# Altium PCB 8bit_reg_v2.PcbDoc
Units mm, origin at the board's own origin, x right, y up, seen from the top; angles counter-clockwise.
Board outline 40 x 50 mm, 2 copper layers (Top Layer, Bottom Layer); 23 components, 38 nets, 110 pads, 28 vias.
Unrouted connection lines stored in the file: 1.
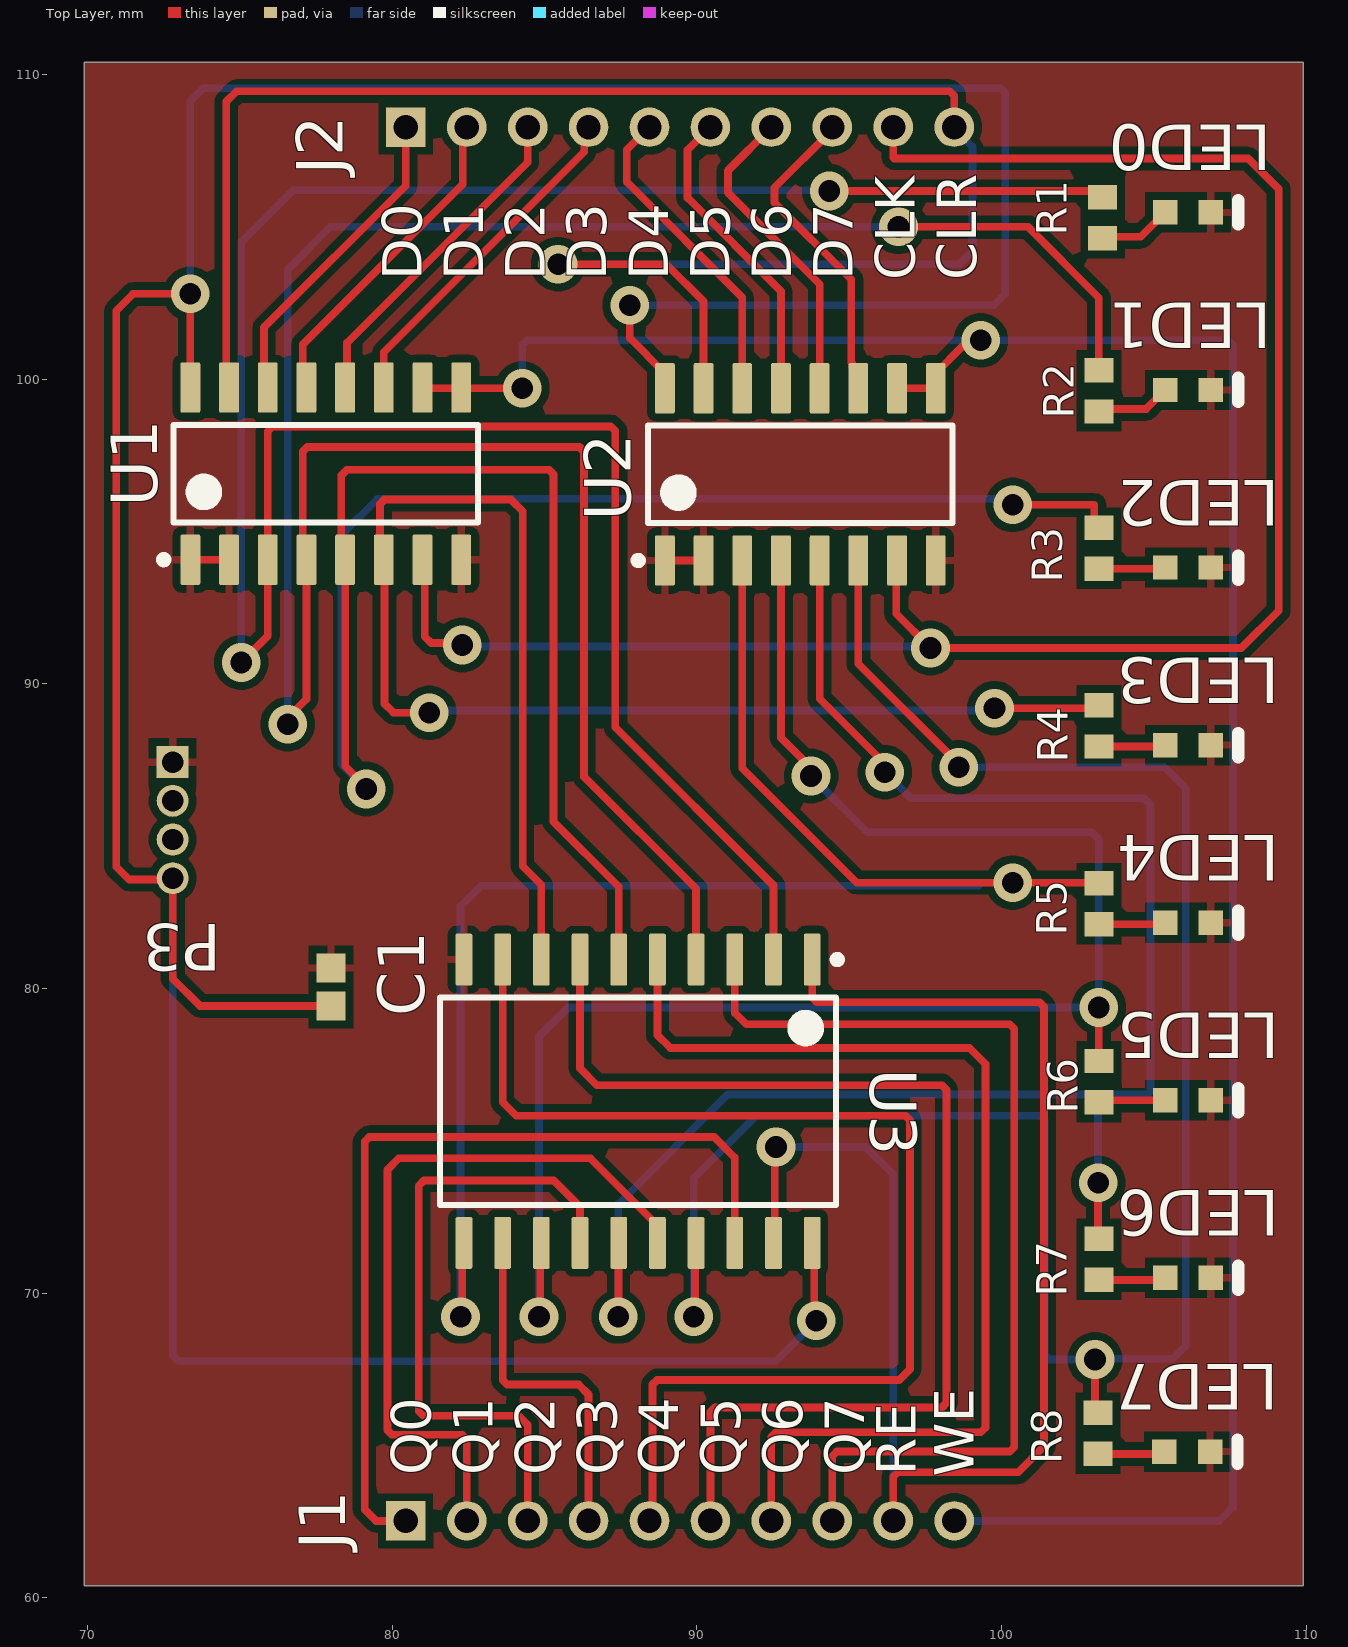
[diagram p0: Top Layer view]
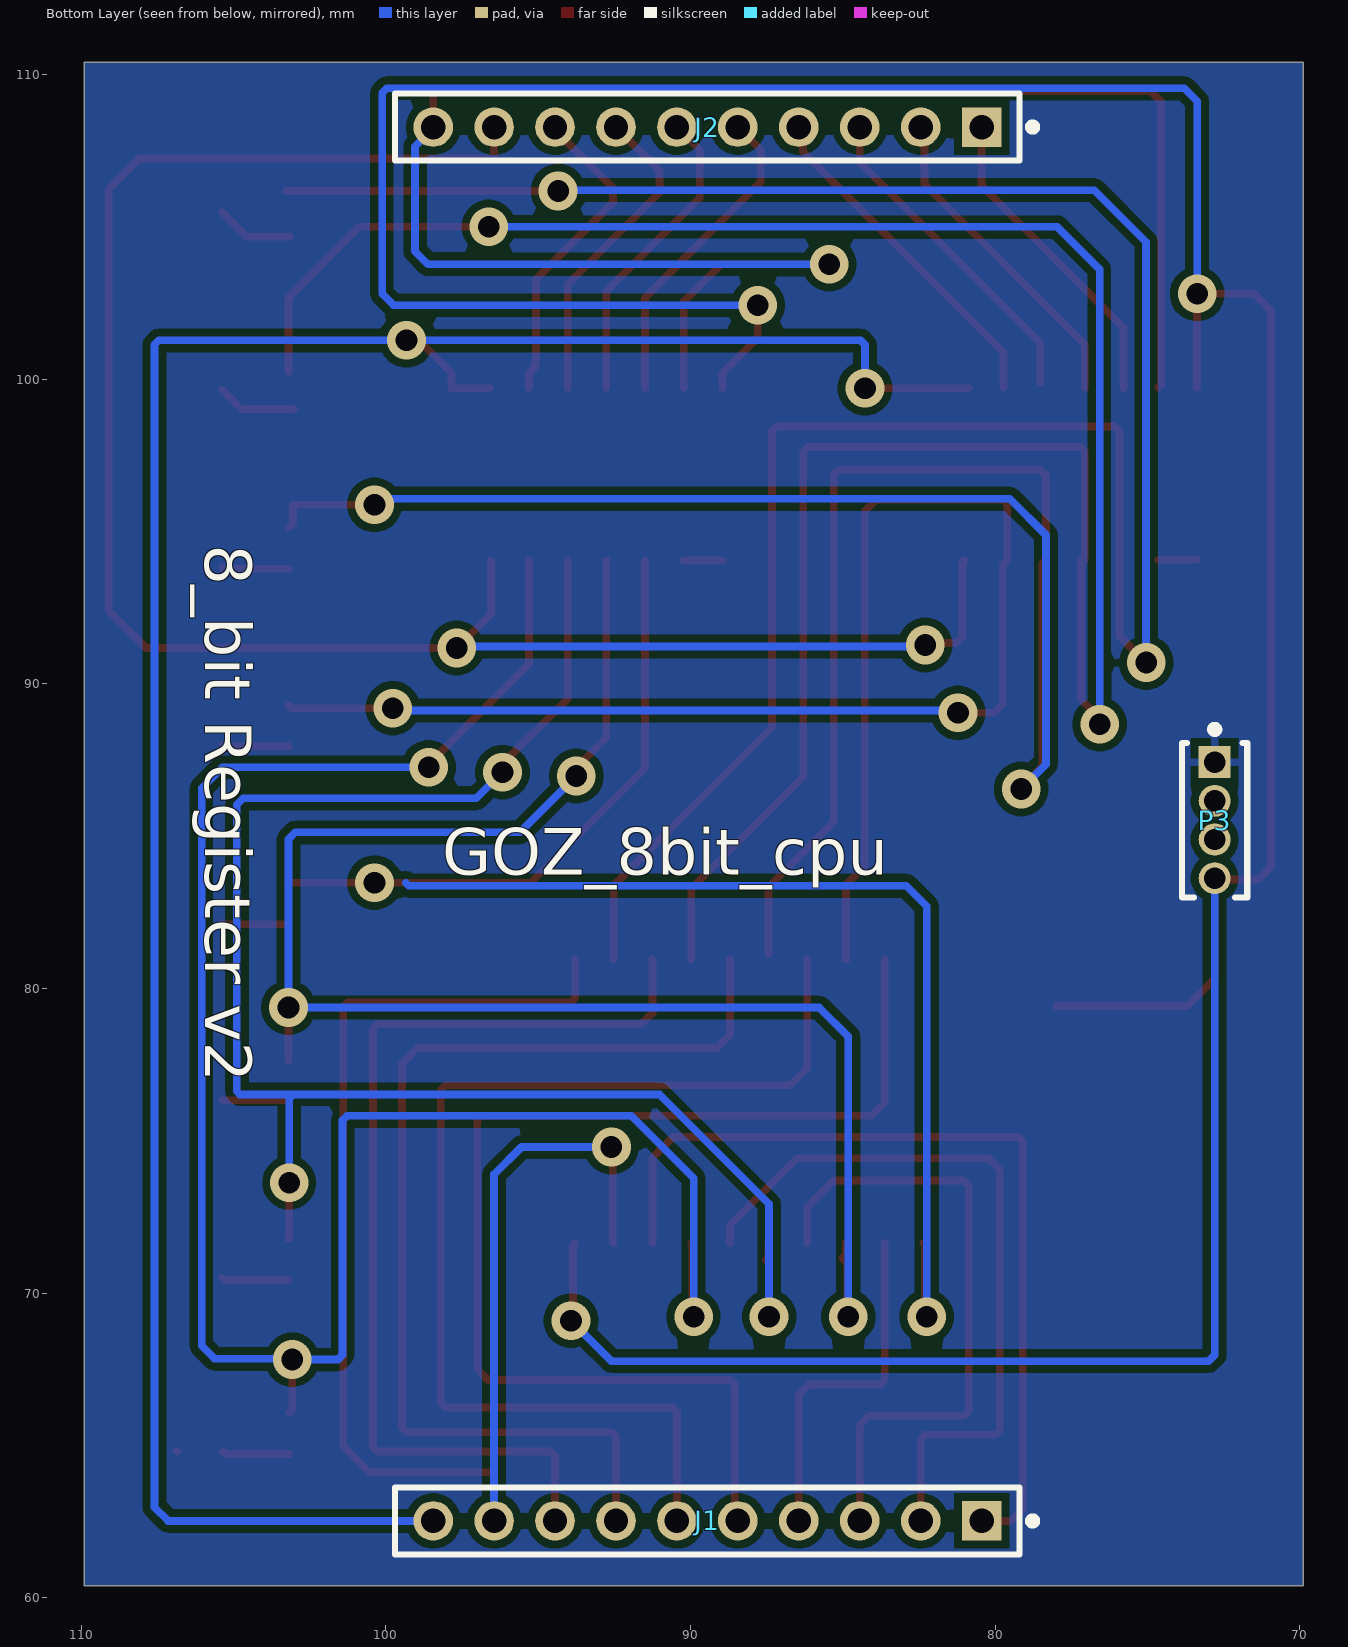
[diagram p1: Bottom Layer view, seen from below]
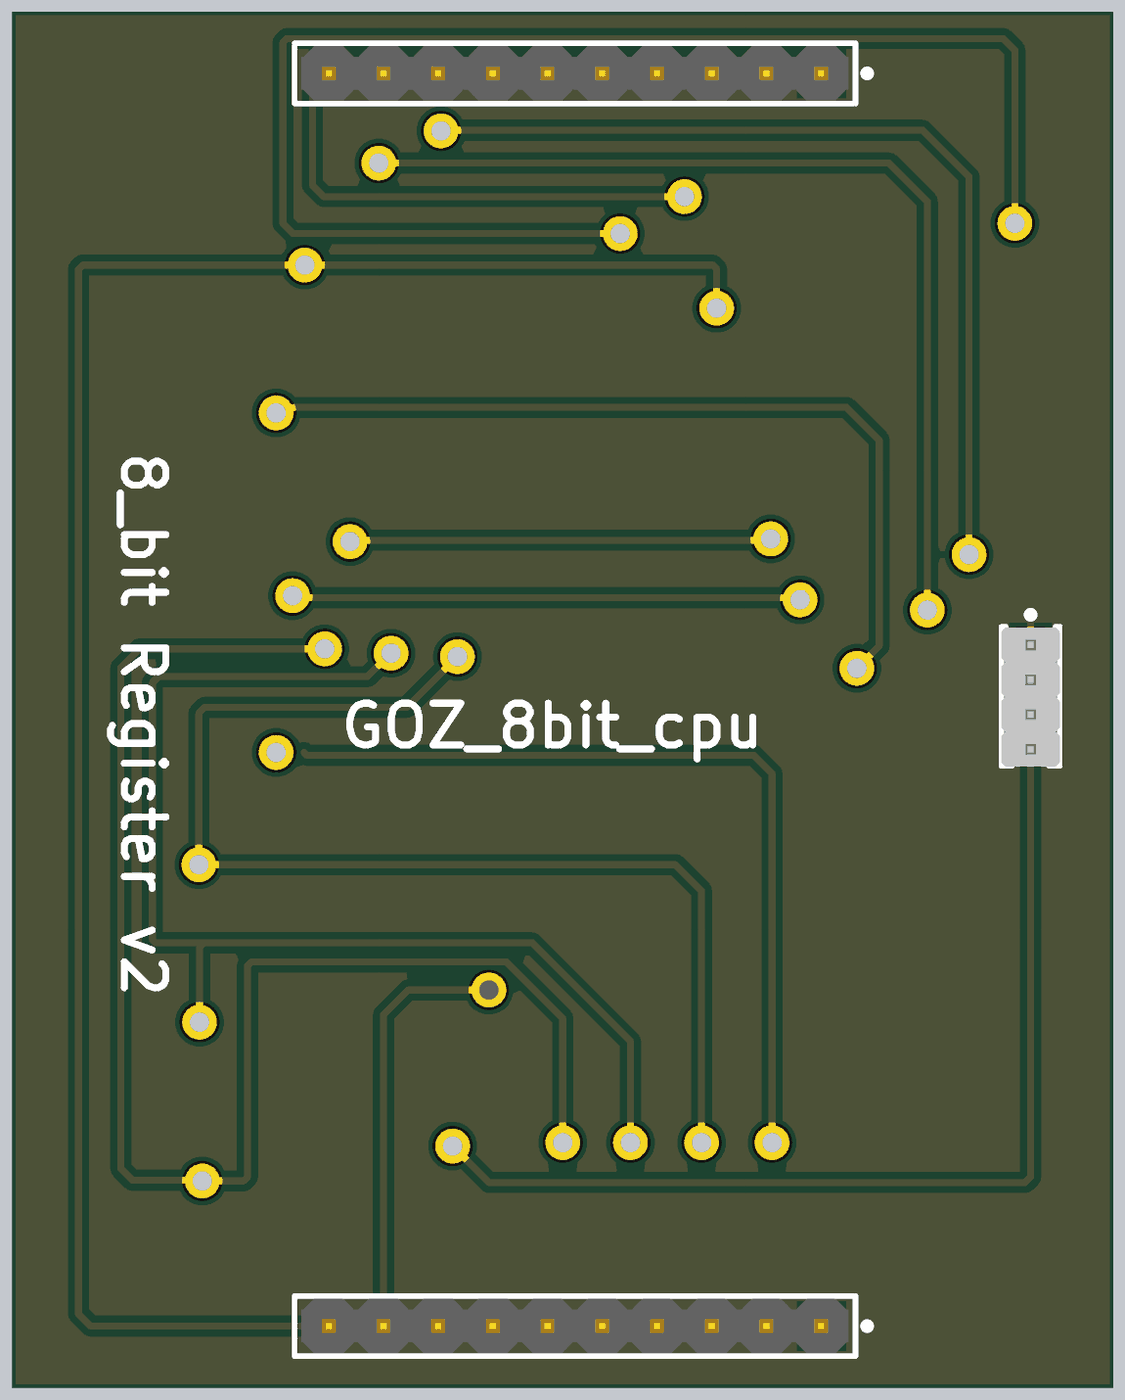
[diagram p2: 3D render of the assembled board from below, using the file's embedded part models]

## Layer stack, top to bottom
Top Solder: solder mask 0.0102, Solder Resist, Dk 3.5
Top Layer: signal copper 0.0356
Dielectric 1: dielectric 0.32, FR-4, Dk 4.8
Bottom Layer: signal copper 0.0356
Bottom Solder: solder mask 0.0102, Solder Resist, Dk 3.5

## Board outline
69.9,60.4 69.9,110.4 109.9,110.4 109.9,60.4

## Design rules (kind name [scope] priority, off if disabled: settings)
Clearance [All] p1: gap=0.254 ignorepadtopadclearanceinfootprint=FALSE
PolygonConnect [All] p1: connectstyle=Relief reliefconductorwidth=0.254 reliefentries=4 polygonreliefangle="90 Angle" airgapwidth=0.254
RoutingVias [All] p1: holewidth=0.711 width=1.27 viastyle="Through Hole" minholewidth=0.711 minwidth=1.27 maxholewidth=0.711 maxwidth=1.27
SolderMaskExpansion [All] p1: expansion=0.102 istentingtop=FALSE
SupplyNets "Schematic Supply Nets_1" [InNet('+5')] p1: voltage=0.000
SupplyNets "Schematic Supply Nets" [InNet('GND')] p2: voltage=0.000
Width [All] p1: maxlimit=0.254 minlimit=0.254 preferedwidth=0.254
30 further rules are at their usual default settings.

## Components (designator, comment, footprint, x,y, rotation, side; value= is the part's Value field where it differs from the comment)
C1 "Capacitor 100 nF +/-10% 50 V 0603" CAPC1608X90X40NL10T20 78,80.05 r90 top value=100nF
J1 "NRPN101PAEN-RC" FP-NRPN101PAEN-RC-MFG 89.45,62.525 r0 bottom
J2 "NRPN101PAEN-RC" FP-NRPN101PAEN-RC-MFG 89.45,108.275 r0 bottom
LED0 "19-217/R6C-AL1M2VY/3T" EVRL-0603-2_V 106.125,105.475 r0 top (schematic designator D1)
LED1 "19-217/R6C-AL1M2VY/3T" EVRL-0603-2_V 106.125,99.646 r0 top (schematic designator D2)
LED2 "19-217/R6C-AL1M2VY/3T" EVRL-0603-2_V 106.125,93.818 r0 top (schematic designator D3)
LED3 "19-217/R6C-AL1M2VY/3T" EVRL-0603-2_V 106.125,87.989 r0 top (schematic designator D4)
LED4 "19-217/R6C-AL1M2VY/3T" EVRL-0603-2_V 106.125,82.161 r0 top (schematic designator D5)
LED5 "19-217/R6C-AL1M2VY/3T" EVRL-0603-2_V 106.125,76.332 r0 top (schematic designator D6)
LED6 "19-217/R6C-AL1M2VY/3T" EVRL-0603-2_V 106.125,70.504 r0 top (schematic designator D7)
LED7 "19-217/R6C-AL1M2VY/3T" EVRL-0603-2_V 106.1,64.8 r0 top (schematic designator D8)
P3 "GRPB041VWVN-RC" SLIN-GRPB041VWVN-RC_V 72.8,85.525 r270 bottom
R1 "ERJ-3RQFR56V" RESC1608X55X30NL15T15 103.325,105.3 r270 top
R2 "ERJ-3RQFR56V" RESC1608X55X30NL15T15 103.2,99.614 r270 top
R3 "ERJ-3RQFR56V" RESC1608X55X30NL15T15 103.2,94.454 r270 top
R4 "ERJ-3RQFR56V" RESC1608X55X30NL15T15 103.2,88.618 r270 top
R5 "ERJ-3RQFR56V" RESC1608X55X30NL15T15 103.2,82.782 r270 top
R6 "ERJ-3RQFR56V" RESC1608X55X30NL15T15 103.2,76.946 r270 top
R7 "ERJ-3RQFR56V" RESC1608X55X30NL15T15 103.2,71.111 r270 top
R8 "ERJ-3RQFR56V" RESC1608X55X30NL15T15 103.175,65.4 r270 top
U1 "SN74LS173AD" D0016A_M 77.825,96.9 r90 top
U2 "SN74LS173AD" D0016A_M 93.4,96.875 r90 top
U3 "SN74ACT244IDWREP" DW0020A_L 88.075,76.3 r270 top

## Footprints (in the part's own frame and the unit in brackets; to place one, negate y for a bottom-side part, rotate by r counter-clockwise, add the part's x,y. Pads: shape width x height; smd on the part's side, far side on the other; paste and mask are expansions set on the pad)
CAPC1608X90X40NL10T20 [mm] "Chip Capacitor, 2-Leads, Body 1.70x0.90mm, IPC Medium Density"
  rect 0.95x0.95 smd: 1(-0.625,0) 2(0.625,0)
  body extent -0.85,-0.45 0.85,0.45, height 0.9
D0016A_M [mm] "SOIC, 16-Leads, Body 10x4mm, Pitch 1.27mm, IPC Low Density"
  rrect15% 1.65x0.65 smd: 1(-2.825,4.445) 2(-2.825,3.175) 3(-2.825,1.905) 4(-2.825,0.635) 5(-2.825,-0.635) 6(-2.825,-1.905) 7(-2.825,-3.175) 8(-2.825,-4.445) 9(2.825,-4.445) 10(2.825,-3.175) 11(2.825,-1.905) 12(2.825,-0.635) 13(2.825,0.635) 14(2.825,1.905) 15(2.825,3.175) 16(2.825,4.445)
  silkscreen extent -2.95,-5 1.6,5.44, body extent -3,-4.95 3,4.95, height 1.59
DW0020A_L [mm] "SOIC, 20-Leads, Body 13x7.6mm, Pitch 1.27mm, IPC High Density"
  rrect18% 1.7x0.55 smd: 1(-4.65,5.715) 2(-4.65,4.445) 3(-4.65,3.175) 4(-4.65,1.905) 5(-4.65,0.635) 6(-4.65,-0.635) 7(-4.65,-1.905) 8(-4.65,-3.175) 9(-4.65,-4.445) 10(-4.65,-5.715) 11(4.65,-5.715) 12(4.65,-4.445) 13(4.65,-3.175) 14(4.65,-1.905) 15(4.65,-0.635) 16(4.65,0.635) 17(4.65,1.905) 18(4.65,3.175) 19(4.65,4.445) 20(4.65,5.715)
  silkscreen extent -4.77,-6.5 3.4,6.67, body extent -5.16,-6.4 5.16,6.4, height 2.52
EVRL-0603-2_V [mm] "SMD, 2-Leads, Body 1.6x0.8mm"
  rect 0.8x0.8 smd: 1(-0.75,0) 2(0.75,0)
  silkscreen extent 1.65,-0.4 1.65,0.4, body extent -0.8,-0.4 0.8,0.4, height 0.5
FP-NRPN101PAEN-RC-MFG [mm]
  rect 1.3x1.3 hole 0.8 paste-2539.97 mask+0: 1(-9,0)
  round 1.3 hole 0.8 paste-2539.97 mask+0: 2(-7,0) 3(-5,0) 4(-3,0) 5(-1,0) 6(1,0) 7(3,0) 8(5,0) 9(7,0) 10(9,0)
  silkscreen extent -10.8,-1.1 10.25,1.1, body extent -9.99,-1 10.01,1, height 5.95
RESC1608X55X30NL15T15 [mm] "Chip Resistor, 2-Leads, Body 1.60x0.80mm, IPC Medium Density"
  rect 0.8x0.95 smd: 1(-0.675,0) 2(0.675,0)
  body extent -0.87,-0.48 0.87,0.48, height 0.55
SLIN-GRPB041VWVN-RC_V [mm] "Header, 4-Leads, Body 5.08x2.14mm, Pitch 1.27mm"
  rect 1.05x1.05 hole 0.7: 1(-1.905,0)
  round 1.05 hole 0.7: 2(-0.635,0) 3(0.635,0) 4(1.905,0)
  silkscreen extent -3.1,-1.07 2.54,1.07, body extent -2.54,-1.07 2.54,1.07, height 4

## Part data
C1: library part CMP-001-00017-6, "Chip Capacitor, 100 nF, +/- 10%, 50 V, 0603 (1608 Metric)", Capacitor Type=Ceramic, Case/Package=0603, Max Operating Temperature=125°C, Min Operating Temperature=-55°C, Tolerance=10%, Voltage Rating=50V, Mounting Technology=SM, Pins=2, RoHS Compliant=True
J1 J2: library part CMP-25680-000006-1, "CONN HEADER VERT 10POS 2MM", Current Rating=2A, Manufacturer=Sullins, Package=0, Temperature="-40°C to +105°C", Temperature Range High=+105°C, Temperature Range Low=-40°C, Voltage Rating=150V, Automotive=No, Category=Conn, ComponentLink2Description=Datasheet, ComponentLink2URL=https://s3.amazonaws.com/catalogspreads-pdf/PAGE104-105%202mm%20MALE%20HDR%20ST%20RA%20SMT.pdf, Conn Gender=Male, Conn Orientation=Straight, Contact Material=Gold,Nickel, Device Class L1=Connectors, Device Class L2="Headers and Wire Housings", Device Class L3=unset, Digikey Description="CONN HEADER VERT 10POS 2MM", Footprint Url=https://drawings-pdf.s3.amazonaws.com/10531.pdf, Height=5.95mm, Lead Free=Yes, Manufacturer Part Number=NRPN101PAEN-RC, Number Of Contacts=10, Number Of Rows=1, Octopart=https://octopart.com/nrpn101paen-rc-sullins-18674398, Pitch=2mm, RoHS=TRUE
LED0 LED1 LED2 LED3 LED4 LED5 LED6 LED7: library part CMP-007-00004-2, "Chip LED, Red, 5 V, 25 mA, -40 to 85 degC, 2-Pin SMD (0603), RoHS, Tape and Reel", Case/Package=0603, Colour=Red, Forward Voltage=2.2V, Manufacturer="Everlight Electronics", Package Description="2-Pin Surface Mount Device, Body 1.6 x 0.8 mm", Datasheet URL=https://datasheet.ciiva.com/4688/el-19-217-r6c-al1m2vy-3tpdf-187026-4688713.pdf, Datasheet Version="Rev. 1, 01/2005", Lens Style=Clear, Manufacturer URL=http://www.everlight.com/, Mounting Technology=SM, Package Reference=0603, RoHS Compliant=False
P3: library part CMP-2000-06373-1, "Male Header, Pitch 1.27 mm, 1 x 4 Position, Height 4 mm, Tail Length 2.3 mm, -40 to 105 degC, RoHS, Bulk", Manufacturer=Sullins, Package Description="Male Header, Pitch 1.27 mm, 1 x 4 Position, Height 4 mm, Tail Length 2.3 mm", Standard Package=1, Catalog Drawings=S9014ESeriesTop, Category=Connectors,Interconnects, Connector Type=Header,Unshrouded, Contact Finish=Gold, Contact Finish Thickness=Flash, Contact Mating Length="0.118\"(3.00mm)", Contact Type=MalePin, Datasheet URL=http://www.sullinscorp.com/drawings/71_GRPB___1VWVN-RC,_10957-C.pdf, Datasheet Version="Rev. C, 12/2008", Dynamic Catalog=GRPB, Family=RectangularConnectors-Headers,MalePins, Manufacturer URL=http://www.sullinscorp.com/, Mating Products="S9010E-04-ND / -CONNHEADER.050\"4POSR/APCB / S9008E-04-ND / -CONNHEADER.050\"4POSPCBGOLD / S9005E-04-ND / -CONNHEADER.050\"4POSSMDGOLD", Mounting Technology=ThroughHole, Mounting Type=ThroughHole, Number of Positions=4, Number of Positions Loaded=All, Number Of Rows=1, Other Names=S9014E-04, Package Reference=GRPB041VWVN-RC, Packaging=Bulk, Pitch="0.050\"(1.27mm)", Termination=Solder
R1 R2 R3 R4 R5 R6 R7 R8: library part CMP-2000-00858-1, Manufacturer=Panasonic, Part Number=ERJ-3RQFR56V
U1 U2: library part CMP-019-00049-1, "TEXAS INSTRUMENTS SN74LS173AD Flip-Flop, D, 17 ns, 50 MHz, 24 mA, SOIC, 16 Pins"
U3: library part CMP-0440-00699-3, "Enhanced Product Octal Buffers/Drivers With 3-State Outputs, DW0020A, LARGE T&R", F @ Nom Voltage(Max)(Mhz)=90, Generic Part Number=SN74ACT244-EP, ICC @ Nom Voltage(Max)(mA)=0.04, Manufacturer="Texas Instruments", Operating Temperature Range(C)="-40 to 85", Rating="HiRel Enhanced Product", tpd @ Nom Voltage(Max)(ns)=9, Voltage(Nom)(V)=5, Code_JEDEC=MS-013, DatasheetVersion=SCAS724B, Input Type=TTL, Output Type=CMOS, PackageReference=DW0020A, PackageVersion=http://www.ti.com/lit/ml/mpds173a/mpds173a.pdf, VCC(Max)(V)=5.5, VCC(Min)(V)=4.5

## Via types
v1: diameter 1.27, hole 0.711, Top Layer to Bottom Layer, 28 vias

## Nets (pads, with @x,y where several pads share a name; then routed paths per layer and width w, separated by ;. In a path a pad name is that pad's centre, name@x,y a point inside that pad or via, vN(x,y) a via of type N, cw(c..) or ccw(c..) an arc to the next point about the centre after c; other vN are vias at no path point)
+5: C1.1 P3.4 U1.16 U2.16 U3.20 | length 130.4
  Top Layer w0.254: U1.16 73.378,99.728 73.378,102.797 v1(73.375,102.8) 71.5,102.8 70.95,102.25 70.95,84 71.375,83.575 72.8,83.575 72.8,80.325 73.7,79.425 C1.1 ; v1(87.8,102.425) 87.8,101.355 88.955,100.2 U2.16 ; U3.20 93.858,71.583 93.858,69.167 v1(93.925,69.1)
  Bottom Layer w0.254: P3.4 72.8,67.97 73,67.77 92.595,67.77 v1(93.925,69.1) ; v1(73.375,102.8) 73.375,109.125 73.8,109.55 99.976,109.55 100.125,109.401 100.125,102.8 99.75,102.425 v1(87.8,102.425)
CLK: J2.9 U1.7 U2.7 | length 62.5
  Top Layer w0.254: U1.7 81.075,94 81.075,91.55 81.284,91.341 82.234,91.341 v1(82.3,91.275) ; J2.9 96.45,107.275 96.481,107.244 108.098,107.244 109.1,106.242 109.1,92.4 107.875,91.175 v1(97.675,91.175) 96.55,92.3 96.55,94.025 U2.7
  Bottom Layer w0.254: v1(82.3,91.275) 82.35,91.225 97.35,91.225 97.4,91.175 v1(97.675,91.175)
CLR: J2.10 U1.15 U2.15 | length 60.8
  Top Layer w0.254: U1.15 74.563,99.813 74.563,109.113 74.9,109.45 98.301,109.45 98.45,109.301 J2.10 ; v1(85.45,103.775) 89,103.775 90.225,102.55 U2.15
  Bottom Layer w0.254: v1(85.45,103.775) 98.625,103.775 99.05,104.2 99.05,107.627 98.45,108.227 J2.10
D0: J2.1 U1.14 | length 10.5
  Top Layer w0.254: U1.14@75.795,99.7 75.795,101.695 80.45,106.35 J2.1
D1: J2.2 U1.13 | length 10.8
  Top Layer w0.254: U1.13@77.065,99.7 77.065,101.14 82.32,106.395 82.32,108.145 J2.2
D2: J2.3 U1.12 | length 10.8
  Top Layer w0.254: U1.12@78.525,99.89 78.525,101.2 84.45,107.125 J2.3
D3: J2.4 U1.11 | length 11.3
  Top Layer w0.254: U1.11 79.73,100.88 86.312,107.462 86.312,108.137 J2.4
D4: J2.5 U2.14 | length 10.5
  Top Layer w0.254: J2.5 87.7,107.525 87.7,106.475 91.495,102.68 U2.14
D5: J2.6 U2.13 | length 10.2
  Top Layer w0.254: J2.6 89.7,107.525 89.7,105.95 92.765,102.885 U2.13
D6: J2.7 U2.12 | length 10.4
  Top Layer w0.254: J2.7 91.025,106.85 91.025,106.125 94.035,103.115 U2.12
D7: J2.8 U2.11 | length 10.5
  Top Layer w0.254: J2.8 94.45,108.178 92.55,106.278 92.55,105.8 95.075,103.275 95.075,100.547 95.107,100.515 95.107,100.398 95.305,100.2 U2.11
GND: C1.2 LED0.2 LED1.2 LED2.2 LED3.2 LED4.2 LED5.2 LED6.2 LED7.2 P3.1 U1.1 U1.2 U1.8 U2.1 U2.2 U2.8 U3.10 | length 2.6
  Top Layer w0.254: U1.1 U1.2 ; U2.1 U2.2 ; LED7.2 LED7.2@106.875,64.825
NetD1_1: LED0.1 R1.2 | length 2.5
  Top Layer w0.254: R1.2@103.168,104.675 104.575,104.675 LED0.1
NetD2_1: LED1.1 R2.2 | length 2.6
  Top Layer w0.254: R2.2@103.031,99.025 104.754,99.025 LED1.1
NetD3_1: LED2.1 R3.2 | length 2.2
  Top Layer w0.254: R3.2 105.336,93.779 LED2.1
NetD4_1: LED3.1 R4.2 | length 2.2
  Top Layer w0.254: R4.2 105.329,87.943 LED3.1
NetD5_1: LED4.1 R5.2 | length 2.2
  Top Layer w0.254: R5.2 105.321,82.107 LED4.1
NetD6_1: LED5.1 R6.2 | length 2.2
  Top Layer w0.254: R6.2 103.261,76.332 LED5.1
NetD7_1: LED6.1 R7.2 | length 2.2
  Top Layer w0.254: R7.2 105.307,70.436 LED6.1
NetD8_1: LED7.1 R8.2 | length 2.2
  Top Layer w0.254: R8.2 105.275,64.725 LED7.1
NetJ1_1: J1.1 U3.18 | length 28.9
  Top Layer w0.254: J1.1 79.475,62.525 79.1,62.9 79.1,74.976 79.249,75.125 90.575,75.125 91.25,74.45 U3.18
NetJ1_2: J1.2 U3.16 | length 24.5
  Top Layer w0.254: J1.2 82.45,65.201 82.301,65.35 79.999,65.35 79.85,65.499 79.85,74.05 80.225,74.425 86.51,74.425 88.71,72.225 U3.16
NetJ1_3: J1.3 U3.14 | length 21.2
  Top Layer w0.254: J1.3 84.45,65.675 84.15,65.975 81.024,65.975 80.875,66.124 80.875,73.525 81.05,73.7 85.307,73.7 86.17,72.837 U3.14
NetJ1_4: J1.4 U3.12 | length 11.7
  Top Layer w0.254: U3.12 83.63,67.149 83.779,67 86.125,67 86.45,66.675 J1.4
NetJ1_5: J1.5 U3.9 | length 39.6
  Top Layer w0.254: U3.9 83.63,76.27 84.075,75.825 96.851,75.825 97,75.676 97,67.5 96.65,67.15 88.699,67.15 88.55,67.001 88.55,62.625 J1.5
NetJ1_6: J1.6 U3.7 | length 37.6
  Top Layer w0.254: U3.7 86.17,77.38 86.725,76.825 98.051,76.825 98.2,76.676 98.2,66.399 98.051,66.25 90.599,66.25 90.45,66.101 J1.6
NetJ1_7: J1.7 U3.5 | length 35.5
  Top Layer w0.254: U3.5 88.71,78.474 89.134,78.05 98.95,78.05 99.475,77.525 99.475,65.586 99.326,65.437 92.599,65.437 92.45,65.288 J1.7
NetJ1_8: J1.8 U3.3 | length 33.1
  Top Layer w0.254: U3.3 91.25,79.199 91.624,78.825 100.276,78.825 100.425,78.676 100.425,64.949 100.276,64.8 94.599,64.8 94.45,64.651 J1.8
Q0: R1.1 U1.3 U3.2 | length 81.7
  Top Layer w0.254: v1(75.05,90.7) 75.923,91.573 75.923,93.948 75.92,93.95 75.92,98.295 76.075,98.45 87.176,98.45 87.325,98.301 87.325,88.575 92.52,83.38 U3.2 ; v1(94.35,106.175) R1.1@103.273,106.175
  Bottom Layer w0.254: v1(75.05,90.7) 75.05,104.5 76.75,106.2 94.325,106.2 v1(94.35,106.175)
Q1: R2.1 U1.4 U3.4 | length 82.3
  Top Layer w0.254: v1(76.575,88.675) 76.575,88.882 77.19,89.497 U1.4 ; U1.4@77.065,94.075 77.065,97.626 77.214,97.775 86.151,97.775 86.3,97.626 86.3,86.95 89.98,83.27 U3.4 ; v1(96.625,105) 100.875,105 103.2,102.675 R2.1@103.2,100.245
  Bottom Layer w0.254: v1(76.575,88.675) 76.575,103.601 77.974,105 v1(96.625,105)
Q2: R3.1 U1.5 U3.6 | length 69.1
  Top Layer w0.254: v1(79.15,86.55) 79.15,86.607 78.46,87.297 78.46,93.95 78.335,94.075 78.335,96.84 78.52,97.025 85.151,97.025 85.3,96.876 85.3,85.475 87.44,83.335 U3.6@87.44,81.125 ; v1(100.375,95.875) 103.051,95.875 103.051,95.277 R3.1
  Bottom Layer w0.254: v1(79.15,86.55) 78.335,87.365 78.335,94.885 79.525,96.075 99.718,96.075 99.724,96.069 100.181,96.069 v1(100.375,95.875)
Q3: R4.1 U1.6 U3.8 | length 50.2
  Top Layer w0.254: v1(81.225,89.05) 80.05,89.05 79.753,89.347 79.753,93.903 79.605,94.05 79.605,95.901 79.754,96.05 83.901,96.05 84.286,95.665 84.286,84.014 84.9,83.4 U3.8 ; v1(99.775,89.2) 103.107,89.2 R4.1
  Bottom Layer w0.254: v1(81.225,89.05) 81.3,89.125 99.7,89.125 v1(99.775,89.2)
Q4: R5.1 U2.3 U3.11 | length 53.4
  Top Layer w0.254: v1(82.25,69.225) 82.305,69.28 82.305,71.595 U3.11 ; U2.3 91.495,87.23 95.25,83.475 99.35,83.475 R5.1@103.2,83.475
  Bottom Layer w0.254: v1(82.25,69.225) 82.25,82.7 82.925,83.375 99.25,83.375 99.35,83.475
  other v1: 100.375,83.475
Q5: R6.1 U2.4 U3.13 | length 55.6
  Top Layer w0.254: v1(84.825,69.225) 84.863,69.263 84.863,70.988 85.025,71.15 84.9,71.275 U3.13 ; U2.4 92.765,88.227 93.75,87.242 v1(93.75,86.975) ; R6.1 v1(103.2,79.375)
  Bottom Layer w0.254: v1(84.825,69.225) 84.825,78.425 85.775,79.375 v1(103.2,79.375) 103.2,84.901 102.976,85.125 95.6,85.125 v1(93.75,86.975)
Q6: R7.1 U2.5 U3.15 | length 56.4
  Top Layer w0.254: v1(87.425,69.225) 87.433,69.233 87.433,71.008 87.525,71.1 87.44,71.185 U3.15 ; U2.5 94.035,89.515 96.175,87.375 v1(96.175,87.1) ; v1(103.175,73.625) 103.175,71.811 R7.1
  Bottom Layer w0.254: v1(87.425,69.225) 87.425,72.925 91.025,76.525 103.026,76.525 ; v1(96.175,87.1) 97.032,86.243 104.682,86.243 104.898,86.026 104.898,76.625 104.798,76.525 103.026,76.525 ; v1(103.175,73.625) 103.175,76.376 103.026,76.525
Q7: R8.1 U2.6 U3.17 | length 68
  Top Layer w0.254: v1(89.9,69.225) 89.94,69.265 89.94,71.61 U3.17 ; U2.6 95.305,90.665 98.6,87.37 v1(98.6,87.259) ; v1(103.075,67.825) 103.075,66.175 R8.1
  Bottom Layer w0.254: v1(89.9,69.225) 89.9,73.775 91.95,75.825 101.276,75.825 101.425,75.676 101.425,67.974 101.574,67.825 v1(103.075,67.825) 103.1,67.85 105.625,67.85 106.05,68.275 106.05,86.575 105.366,87.259 v1(98.6,87.259)
Read_Enable: J1.9 U3.1 U3.19 | length 49
  Top Layer w0.254: U3.19 92.56,71.69 92.56,74.76 v1(92.6,74.8) ; U3.1 93.79,79.699 93.939,79.55 101.251,79.55 101.4,79.401 101.4,64.975 100.55,64.125 96.599,64.125 96.45,63.976 J1.9
  Bottom Layer w0.254: v1(92.6,74.8) 95.551,74.8 96.45,73.901 J1.9
Write_Enable: J1.10 U1.9 U1.10 U2.9 U2.10 | length 79.5
  Top Layer w0.254: U1.10@80.875,99.7 82.145,99.7 v1(84.275,99.7) ; U2.10 U2.9 97.845,100.2 98.726,101.081 99.131,101.081 v1(99.325,101.275)
  Bottom Layer w0.254: v1(84.275,99.7) 84.275,101.126 84.424,101.275 107.451,101.275 107.6,101.126 107.6,62.975 107.15,62.525 J1.10
pads on no net: P3.2 P3.3

## Polygon pours and split planes (outlines as drawn)
GND on Bottom Layer "NONET_L01_P-001" (solid, pour order 0): 69.9,110.4 109.9,110.4 109.9,60.4 69.9,60.4 69.9,110.4
GND on Top Layer "NONET_L01_P-001" (solid, pour order 1): 70.139,110.4 109.9,110.4 109.9,60.4 69.9,60.4 69.9,110.4

## Silkscreen, mask and mechanical layers (free items; w line width, h text height)
Top Overlay:
  text "D0" at 80.971,103.254 h1.3 r90
  text "D1" at 82.993,103.254 h1.3 r90
  text "D2" at 85.015,103.254 h1.3 r90
  text "D3" at 87.038,103.254 h1.3 r90
  text "D4" at 89.06,103.254 h1.3 r90
  text "D5" at 91.082,103.254 h1.3 r90
  text "D6" at 93.104,103.254 h1.3 r90
  text "D7" at 95.127,103.254 h1.3 r90
  text "CLK" at 97.149,103.254 h1.3 r90
  text "CLR" at 99.171,103.254 h1.3 r90
  text "Q0" at 81.271,64.029 h1.3 r90
  text "Q1" at 83.303,64.029 h1.3 r90
  text "Q2" at 85.335,64.029 h1.3 r90
  text "Q3" at 87.367,64.029 h1.3 r90
  text "Q4" at 89.4,64.029 h1.3 r90
  text "Q5" at 91.432,64.029 h1.3 r90
  text "Q6" at 93.464,64.029 h1.3 r90
  text "Q7" at 95.496,64.029 h1.3 r90
  text "RE" at 97.196,64.004 h1.3 r90
  text "WE" at 99.096,63.979 h1.3 r90
Bottom Overlay:
  text "8_bit Register v2" at 105.938,94.571 h1.52 r90
  text "GOZ_8bit_cpu" at 98.146,83.737 h1.52
Board:
  the board outline again, w0.254